# EAGLE board USB Experiment Board (EAGLE 9.6.2)

Size 70.03 x 80 mm. Coordinates in mm from the lower left corner, seen from the top.
Outline: 4,0 0,0 0,4
Outline: 66,0 70,0 70,29
Outline: 70,76 70,80 67,80
Outline: 4,80 0,80 0,76
Outline: 0,76 arc-90 4,80
Outline: 0,76 0,4
Outline: 0,4 arc90 4,0
Outline: 4,0 66,0
Outline: 66,0 arc90 70,4 70,29
Outline: 70,29 70,76
Outline: 70,76 arc90 67,80
Outline: 67,80 4,80
Copper layers (1*16): Top 0.035mm / dielectric 1.5mm / Bottom 0.035mm
Design rules "default": minimum track width 10mil, minimum drill 24mil, track to track 8mil, track to pad 8mil, pad to pad 8mil, via to via 8mil, smd to smd 8mil, copper to edge 40mil, drill to drill 8mil, minimum pad ring 10mil, minimum via ring 8mil, stop-mask expansion 4mil, vias tented up to drill 0mil, thermal gap 10mil

## Footprints (pad centres in the part's own frame; a part is rotated, then mirrored left to right if it is on the bottom)
1X10-BIG = drill 1.016 pad 1.778 octagon: 1 -11.43,0; 2 -8.89,0; 3 -6.35,0; 4 -3.81,0; 5 -1.27,0; 6 1.27,0; 7 3.81,0; 8 6.35,0; 9 8.89,0; 10 11.43,0
B3F-10XX = drill 1.016 long: 1 -3.251,2.261; 2 3.251,2.261; 3 -3.251,-2.261; 4 3.251,-2.261
1X02 = drill 1.016 long: 1 -1.27,0; 2 1.27,0
1206 = smd 1.6 x 1.803: A -1.422,0; C 1.422,0
1X04 = drill 1.016 long: 1 -3.81,0; 2 -1.27,0; 3 1.27,0; 4 3.81,0
SIP10 = drill 0.6 long: 1 -11.46,0; 2 -8.92,0; 3 -6.38,0; 4 -3.84,0; 5 -1.3,0; 6 1.24,0; 7 3.78,0; 8 6.32,0; 9 8.86,0; 10 11.4,0
USB-FEMALE-A-PTH = drill 0.9: D+ 5.9,1.3; D- 7.9,1.3; GND 3.4,1.3; VBUS 10.4,1.3 | drill 3: GND@1 13.5,4; GND@2 0.3,4
MOLEX_480371000 = smd 1.2 x 2: 1 3.5,2.6; 2 1,2.6; 3 -1,2.6; 4 -3.5,2.6 | drill 2.5: M1 -5.7,0; M2 5.7,0 | hole 1.1: -2.25,0; 2.25,0

## Placement (x,y rotation side)
BB_1  PINHD-1X10  [1X10-BIG]  21.5,15.5 0 top
BB_2  PINHD-1X10  [1X10-BIG]  21.5,18 0 top
BB_3  PINHD-1X10  [1X10-BIG]  21.5,20.5 0 top
BB_4  PINHD-1X10  [1X10-BIG]  21.5,23 0 top
BB_5  PINHD-1X10  [1X10-BIG]  21.5,25.5 0 top
BB_6  PINHD-1X10  [1X10-BIG]  21.5,28 0 top
BB_7  PINHD-1X10  [1X10-BIG]  21.5,33 0 top
BB_8  PINHD-1X10  [1X10-BIG]  21.5,30.5 0 top
BB_9  PINHD-1X10  [1X10-BIG]  21.5,35.5 0 top
BB_10  PINHD-1X10  [1X10-BIG]  21.5,38 0 top
BB_11  PINHD-1X10  [1X10-BIG]  48,23 180 top
BB_12  PINHD-1X10  [1X10-BIG]  48,18 180 top
BB_13  PINHD-1X10  [1X10-BIG]  48,15.5 180 top
BB_14  PINHD-1X10  [1X10-BIG]  48,38 0 top
BB_15  PINHD-1X10  [1X10-BIG]  48,20.5 180 top
BB_16  PINHD-1X10  [1X10-BIG]  48,35.5 180 top
BB_17  PINHD-1X10  [1X10-BIG]  48,25.5 180 top
BB_18  PINHD-1X10  [1X10-BIG]  48,28 180 top
BB_19  PINHD-1X10  [1X10-BIG]  48,33 180 top
BB_20  PINHD-1X10  [1X10-BIG]  48,30.5 180 top
BUTTON_1_SYNC  [B3F-10XX]  48,56 90 top
BUTTON_2  [B3F-10XX]  62,56 270 top
BUTTON_INPUTS  [1X02]  40,42 0 top
GND_RAIL_L  PINHD-1X10  [1X10-BIG]  6,26.5 90 top
GND_RAIL_R  PINHD-1X10  [1X10-BIG]  63,26.5 90 top
JP_DTA  [1X02]  31.4,3.5 270 top
LED1  [1206]  57,70.5 90 top
LED2  [1206]  49.5,70.5 90 top
LED3  [1206]  42,70.5 90 top
LED4  [1206]  34.5,70.5 90 top
LED_HEADER  [1X04]  55.8,41.5 180 top
POWER  [1206]  29.5,70.5 90 top
R_ARRAY_1  [SIP10]  54,65 0 top
R_ARRAY_2  [SIP10]  17,58 0 top
R_ARRAY_2_CON  PINHD-1X10  [1X10-BIG]  21.5,41.5 180 top
U$1  USB  [USB-FEMALE-A-PTH]  9.5,72.5 0 top
VCC_RAIL_L  PINHD-1X10  [1X10-BIG]  3,26.5 90 top
VCC_RAIL_R  PINHD-1X10  [1X10-BIG]  66,26.5 90 top
X1  USB-A  [MOLEX_480371000]  19.5,3 0 top

## Library data of the parts
BB_1-BB_20 GND_RAIL_L GND_RAIL_R LED1-LED4 POWER R_ARRAY_2_CON VCC_RAIL_L VCC_RAIL_R X1 = adafruit
BUTTON_1_SYNC BUTTON_2 = switch-omron; MPN: B3F-1000; OC_FARNELL: 176432; OC_NEWARK: 36M3542
BUTTON_INPUTS JP_DTA LED_HEADER = pinhead
R_ARRAY_1 R_ARRAY_2 = resistor-sip
U$1 = STUNTAZ

## Nets
B1_INPUT: BUTTON_1_SYNC.1 BUTTON_INPUTS.1
B2_OUTPUT: BUTTON_2.4 BUTTON_INPUTS.2
GND: GND_RAIL_L.1 GND_RAIL_L.2 GND_RAIL_L.3 GND_RAIL_L.4 GND_RAIL_L.5 GND_RAIL_L.6 GND_RAIL_L.7 GND_RAIL_L.8 GND_RAIL_L.9 GND_RAIL_L.10 GND_RAIL_R.1 GND_RAIL_R.2 GND_RAIL_R.3 GND_RAIL_R.4 GND_RAIL_R.5 GND_RAIL_R.6 GND_RAIL_R.7 GND_RAIL_R.8 GND_RAIL_R.9 GND_RAIL_R.10 R_ARRAY_1.1 R_ARRAY_2.1 U$1.GND X1.4
N$1: R_ARRAY_2.2 R_ARRAY_2_CON.10
N$2: LED1.C R_ARRAY_1.9
N$3: JP_DTA.1 U$1.D+ X1.3
N$4: JP_DTA.2 U$1.D- X1.2
N$5: LED2.C R_ARRAY_1.8
N$6: LED3.C R_ARRAY_1.7
N$7: LED4.C R_ARRAY_1.6
N$8: LED1.A LED_HEADER.1
N$9: LED2.A LED_HEADER.2
N$10: LED3.A LED_HEADER.3
N$11: LED4.A LED_HEADER.4
N$12: R_ARRAY_2.3 R_ARRAY_2_CON.9
N$13: POWER.C R_ARRAY_1.5
N$14: R_ARRAY_2.4 R_ARRAY_2_CON.8
N$15: R_ARRAY_2.5 R_ARRAY_2_CON.7
N$16: R_ARRAY_2.6 R_ARRAY_2_CON.6
N$17: R_ARRAY_2.7 R_ARRAY_2_CON.5
N$18: R_ARRAY_2.8 R_ARRAY_2_CON.4
N$19: R_ARRAY_2.9 R_ARRAY_2_CON.3
R_ARRAY_1_8: BUTTON_1_SYNC.4 R_ARRAY_1.2
VCC: BUTTON_2.1 POWER.A U$1.VBUS VCC_RAIL_L.1 VCC_RAIL_L.2 VCC_RAIL_L.3 VCC_RAIL_L.4 VCC_RAIL_L.5 VCC_RAIL_L.6 VCC_RAIL_L.7 VCC_RAIL_L.8 VCC_RAIL_L.9 VCC_RAIL_L.10 VCC_RAIL_R.1 VCC_RAIL_R.2 VCC_RAIL_R.3 VCC_RAIL_R.4 VCC_RAIL_R.5 VCC_RAIL_R.6 VCC_RAIL_R.7 VCC_RAIL_R.8 VCC_RAIL_R.9 VCC_RAIL_R.10 X1.1

## Tracks (layer width: path | path; a pad name or v marks a point on that pad's centre or on a via)
B1_INPUT  (1 unrouted)
B2_OUTPUT  (1 unrouted)
GND  (23 unrouted)
N$1  (1 unrouted)
N$2  (1 unrouted)
N$3  (2 unrouted)
N$4  (2 unrouted)
N$5  (1 unrouted)
N$6  (1 unrouted)
N$7  (1 unrouted)
N$8  (1 unrouted)
N$9  (1 unrouted)
N$10  (1 unrouted)
N$11  (1 unrouted)
N$12  (1 unrouted)
N$13  (1 unrouted)
N$14  (1 unrouted)
N$15  (1 unrouted)
N$16  (1 unrouted)
N$17  (1 unrouted)
N$18  (1 unrouted)
N$19  (1 unrouted)
R_ARRAY_1_8  (1 unrouted)
VCC  (23 unrouted)

## Text on the board
tNames: + | + | R_ARRAY_LEDS | GND | GND | < B1 Sync | < B2 | < LED4 | < LED3 | < LED2 | < LED1 | R8 > | R7 > | R6 > | R5 > | R4 > | R3 > | R2 > | R1 > | + | Experimentation Board | VCC > | GND > | GND > | VCC > | G | V | D- | D+
bNames: USB Experimentation / Board | Resistor Array In the Bottom | GND | www.FredericTorres.com | PCBv4 - 2023.03